# Altium PCB PC110.PcbDoc (part 13 of 24)
Units mm, origin at the board's own origin, x right, y up, seen from the top; angles counter-clockwise.
Board outline 150.05 x 107.35 mm, 10 copper layers (In2.Cu, F.Cu, B.Cu, In1.Cu, In3.Cu, In4.Cu, In5.Cu, In6.Cu, In7.Cu, In8.Cu); 936 components, 1434 nets, 4891 pads, 6088 vias.
Unrouted connection lines stored in the file: 2995.
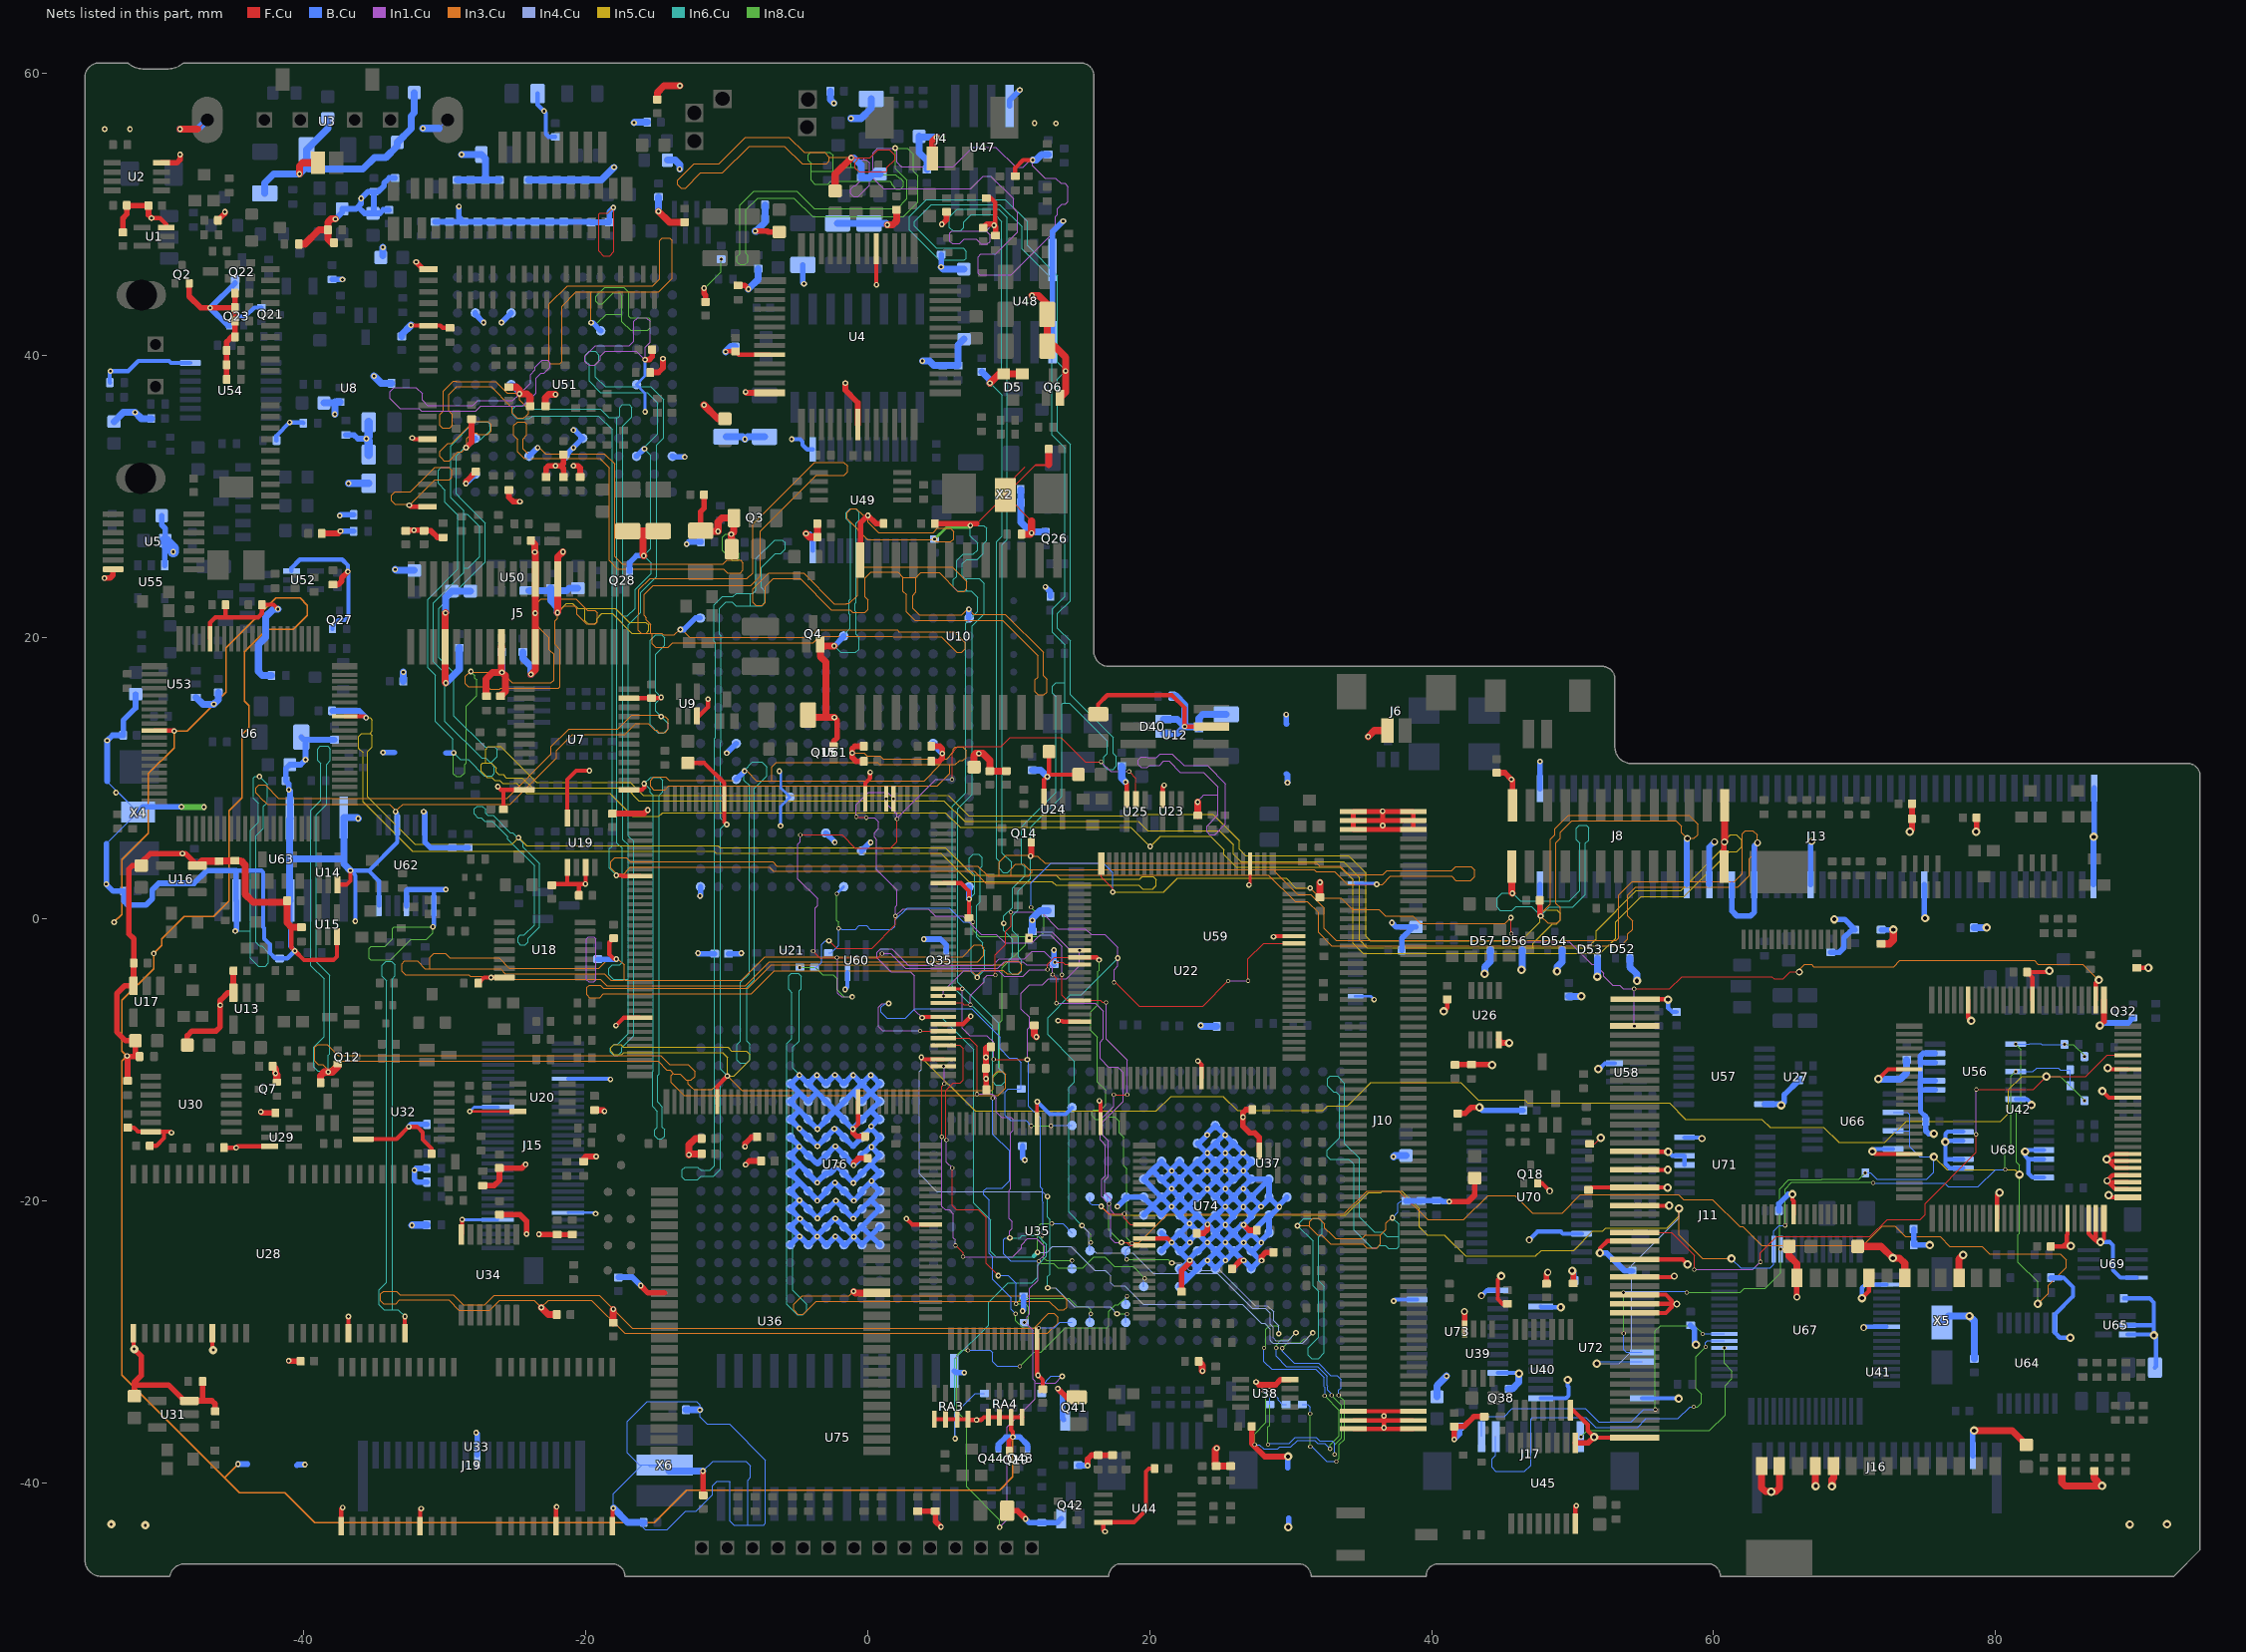
[diagram p20: the nets of this part, all layers, seen from the top]

## Via types
v1: diameter 0.3, hole 0.2, B.Cu to In8.Cu, tented both sides, 1934 vias
v2: diameter 0.4, hole 0.2, F.Cu to B.Cu, tented both sides, 1902 vias
v3: diameter 0.3, hole 0.2, F.Cu to In1.Cu, tented both sides, 1729 vias
v4: diameter 0.6, hole 0.3, F.Cu to B.Cu, tented both sides, 354 vias
v5: diameter 0.5, hole 0.3, F.Cu to B.Cu, tented both sides, 136 vias
v6: diameter 0.4, hole 0.2, B.Cu to In8.Cu, tented both sides, 12 vias
v7: diameter 0.3, hole 0.2, F.Cu to B.Cu, tented both sides, 6 vias
v8: diameter 0.6, hole 0.2, F.Cu to B.Cu, tented both sides, 4 vias
v9: diameter 0.5, hole 0.2, B.Cu to In8.Cu, tented both sides, 3 vias
v10: diameter 0.5, hole 0.2, F.Cu to B.Cu, tented both sides, 2 vias
v11: diameter 0.4, hole 0.3, F.Cu to B.Cu, tented both sides, 2 vias
v12: diameter 0.3, hole 0.2, F.Cu to In4.Cu, tented both sides, 2 vias
v13: diameter 0.6, hole 0.3, B.Cu to In8.Cu, tented both sides, 1 vias
v14: diameter 0.3, hole 0.2, F.Cu to In3.Cu, tented both sides, 1 vias

## Nets (pads, with @x,y where several pads share a name; then routed paths per layer and width w, separated by ;. In a path a pad name is that pad's centre, name@x,y a point inside that pad or via, vN(x,y) a via of type N, cw(c..) or ccw(c..) an arc to the next point about the centre after c; other vN are vias at no path point) (continued)
GND: (continued)
  In8.Cu w0.08: -47.1,7.97 v2(-47.08,7.95) ; v2(-29.37,11.8) -29.38,11.79 -29.38,10.31 -29.2,10.13 -28.85,10.13 -28.59,10.39 -28.59,10.98 -28.48,11.09 -28.48,15.11 -27.72,15.87 -27.72,16.97 -27.86,17.11 -27.86,17.28 v2(-28.15,17.57) ; v2(-19.62,42.31) -19.17,42.31 -19.16,42.3 -18.54,42.92 -17.43,42.92 -17.43,42.84 ; v2(-11.61,44.76) -11.55,44.76 -10.4,45.91 v1(-10.4,46.82) ; -4.01,53.05 -2.29,53.05 -2.02,53.32 -1.17,53.32 ; -2.46,53.05 -2.46,54.17 -2.69,54.4 -4.06,54.4 -4.23,54.23 -4.23,53.82 -4.01,53.6 -4.01,52.4 -3.75,52.14 -2.82,52.14 -2.63,52.33 1.56,52.33 1.71,52.18 1.71,52.1 2.015,51.795 2.335,51.795 2.545,52.005 2.545,52.325 2.325,52.545 2.255,52.545 1.98,52.82 -0.45,52.82 -0.95,53.32 -1.17,53.32 ; v2(-1.17,54) -1.17,53.32 ; 79.37,-0.62 v4(79.37,-0.6) ; -17.43,42.84 -17.43,44.22 -17.62,44.41 -18.06,44.41 -18.81,43.66 -19.11,43.66 -19.29,43.84 -19.29,44.16 -18.64,44.81 -17.3,44.81 -16.94,44.45 -16.94,42.76 -16.83,42.65 -15.53,42.65 -15.42,42.54 -15.42,41.96 -15.61,41.77 -16.82,41.77 -17.43,42.38 -17.43,42.84 ; -35.37,-2.76 -35.37,-2.07 -35.22,-1.92 -34.25,-1.92 -33.71,-1.38 -33.71,-0.65 -33.6,-0.54 -31.05,-0.54 v2(-30.85,-0.54) -30.85,-0.99 -31.29,-1.43 -32.41,-1.43 -33.85,-2.87 -35.26,-2.87 -35.37,-2.76 ; -10.31,26.15 -10.31,27.09 -10.1,27.3 v2(-9.68,27.3) -9.68,26.48 -9.12,25.92 -9.12,25.56 -9.24,25.44 -9.6,25.44 -10.31,26.15 ; -9.265,46.625 -9.265,46.995 -9.07,47.19 -9.07,50.65 -8.12,51.6 -8.07,51.65 -5.05,51.65 -3.83,50.43 -3.79,50.39 2.09,50.39 2.79,51.09 2.79,52.4 1.95,53.24 v2(1.95,54.69) 2.81,54.69 3.24,54.26 3.24,53.06 3.55,52.75 3.55,50.87 2.52,49.84 -3.92,49.84 -5.23,51.15 -7.81,51.15 -8.64,50.32 -8.64,47.2 -8.515,47.075 -8.515,46.625 -8.715,46.425 -9.065,46.425 -9.265,46.625
  In8.Cu w0.2: v6(4.74,26.96) 5.58,27.8 7.16,27.8 v2(7.28,27.92)
  In8.Cu w0.4: v2(-48.68,7.97) -48.66,7.95 -47.12,7.95 -47.1,7.97
  B.Cu w0.08: -54.01,5.35 X4.3@-51.76,7.6 ; -53.95,9.79 X4.3@-51.76,7.6 ; C226.1@-53.46,35.295 C226.1@-53.455,35.295 ; v2(-53.32,8.98) -53.14,8.98 X4.3@-51.76,7.6 ; v2(-36.83,30.91) v2@-36.82,30.92 ; C176.2@-34.535,46.93 C176.2@-34.39,47.075 ; C168.1@-33.365,55.1 C168.1@-33.36,55.1 ; -30.41,56.09 -29.8,56.7 ; -30.001,11.891 -29.91,11.8 ; v2(-28.81,54.24) v2@-28.8,54.23 ; v2(-25.98,42.32) v2@-25.97,42.32 ; v2@-25.96,17.52 v2(-25.95,17.51) ; v2@-23.42,33.44 v2(-23.41,33.44) ; v2@-18.29,-11.32 v2(-18.25,-11.36) ; v2(-18.04,-41.77) -18.04,-40.74 -16.01,-38.71 -15.57,-38.71 -15.49,-38.79 X6.3@-14.46,-38.79 ; C283.2@-15.93,-42.84 -15.93,-43.15 -15.78,-43.3 -14.22,-43.3 -12.92,-42 -12.19,-42 -11,-40.81 -11,-40.2 -10.68,-39.88 -9.81,-39.88 -9.77,-39.92 -9.77,-42.68 -9.49,-42.96 -8.41,-42.96 ; v2@-15.88,33.36 v2(-15.84,33.36) ; v2(-14.85,50.21) v2@-14.84,50.22 ; X6.3@-14.11,-39.14 X6.3@-14.46,-38.79 ; v2@-13.04,32.84 v2(-12.98,32.78) ; v2@-11.91,-34.8 v2(-11.9,-34.81) ; v2(-11.69,-39.14) -10.99,-38.44 -8.65,-38.44 -8.33,-38.76 -8.33,-39.6 -8.51,-39.78 -8.51,-42.96 -8.41,-42.96 ; v2(-8.71,34.05) v2@-8.69,34.05 ; v2(-2.34,5.45) v2@-2.34,5.47 ; v2(5.2,46.26) v2@5.21,46.27 ; v2@7.165,21.975 v2(7.17,21.98) ; v2@7.18,1.44 v2(7.19,1.43) ; C208.1@10.84,30.5 C208.1@10.85,30.49 ; v2(10.98,-27.79) v2@11.05,-27.72 ; v2(13.21,-2.19) v2@13.22,-2.2 ; Q41.1@13.89,-35.47 Q41.1@14.01,-35.59 ; R408.1@14.91,-38.72 R408.1@14.94,-38.75 ; 29.7,10.302 29.7,10.362 ; 29.7,13.859 29.7,13.88 29.76,13.94 ; v4(29.81,-38.11) v4@29.85,-38.15 ; v4(29.82,-43.11) v4@29.85,-43.08 ; v2(37.22,-21.18) 37.62,-20.78 37.62,-20.16 37.8,-19.98 C278.1@38.17,-19.98 ; v4@46.145,-32.175 v4(46.19,-32.22) ; v2(47.68,11.19) v2@47.69,11.18 ; v4@50.6,-5.48 v4(50.61,-5.47) ; v4(51.75,-4.07) v4@51.76,-4.06 ; v4(51.81,-10.63) v4@51.89,-10.63 ; v5@58.09,5.68 v5(58.14,5.73) ; v5@66.89,5.46 v5(66.95,5.52) ; C235.2@70.03,-0.75 C235.2@70.03,-0.74 ; v4@72.74,-0.75 v4(72.75,-0.74) ; v4@75.32,-23.11 v4(75.33,-23.12) ; v4@79.36,-0.61 v4(79.37,-0.6) ; v4(86.97,5.84) v4@86.99,5.86 ; v4(87.44,-22.91) v4@87.45,-22.9 ; X6.3@-14.46,-38.79 -14.54,-38.71 -16.22,-38.71 -17.07,-37.86 -17.07,-35.63 -15.64,-34.2 -12.14,-34.2 -11.9,-34.44 v2(-11.9,-34.81) ; v2(-11.9,-34.81) -11.9,-35.32 -11.41,-35.81 -9.82,-35.81 -7.25,-38.38 -7.25,-42.85 -7.36,-42.96 -8.41,-42.96
  B.Cu w0.2: v2@-28.74,-21.33 v2(-28.77,-21.3) -28.75,-21.32 J15.26@-26.25,-21.32 ; v2(-28.231,-13.628) -27.924,-13.32 J15.10@-26.2,-13.32 ; J15.36@-21.25,-20.82 -21.24,-20.81 -19.38,-20.81 v2(-19.3,-20.89) v2@-19.36,-20.83 ; v2(-15.79,35.99) -15.79,37.31 U51.L7@-16.4,37.92 -15.79,38.53 v2(-15.79,39.69) ; v2(-6.27,10.5) -6.16,10.39 -6.16,9.29 -5.52,8.65 -6.18,7.99 v2(-6.18,6.62) ; U59.39@34.59,-5.46 35.68,-5.46 v2(35.92,-5.7) ; U59.23@34.59,2.54 36.03,2.54 v2(36.1,2.47)
  B.Cu w0.3: R280.2@-53.76,38.06 -53.77,38.07 -53.77,38.82 v2(-53.72,38.87) -52.47,38.87 -51.74,39.6 -49.57,39.6 -49.43,39.46 U54.7@-48.055,39.46 ; Q23.2@-45.26,42.11 -45.26,42.43 -44.95,42.74 -44.15,42.74 -43.5,43.39 Q21.2@-43.01,43.39 ; -44.8,3.45 -43,3.45 -42.88,3.33 -42.88,-0.56 -42.81,-0.63 -42.81,-1.39 -42.4,-1.8 -42.4,-2.4 -42.02,-2.78 C258.1@-41.72,-2.78 -41.17,-2.78 v2(-40.64,-2.25) -40.96,-1.93 U63.12@-40.96,1.31 ; C231.1@-41.94,33.95 -41.94,34.3 v2(-41,35.24) -40.09,35.24 R279.2@-40.04,35.19 ; U63.5@-40.975,7.16 U63.5@-40.96,7.145 ; U52.3@-40.88,24.7 -40.88,24.91 -40.28,25.51 -37.28,25.51 -36.88,25.11 v2(-36.88,24.65) -36.84,24.61 -36.84,21.46 -37.09,21.21 -37.56,21.21 -37.96,20.81 Q27.2@-37.96,20.58 ; v2(-36.35,-0.14) -36.35,3.1 v2(-36.7,3.45) -35.42,3.45 -35.4,3.43 ; U62.7@-34.67,0.957 -34.67,2.7 -35.4,3.43 ; v2(-33.5,7.63) -33.37,7.5 U62.10@-33.37,6.683 -33.37,5.46 -35.4,3.43 ; v2(-30.85,-0.54) -30.77,-0.46 U62.1@-30.77,0.957 -30.77,2.1 ; R230.1@-23.417,58.56 -23.417,57.777 v2(-22.96,57.32) -22.83,57.19 -22.83,55.7 -22.62,55.49 C198.2@-22.16,55.49 ; J15.55@-21.25,-11.32 v2@-18.29,-11.32 ; v2(-5.4,34.05) -4.8,34.05 -4.62,33.87 -4.62,33.64 -4.3,33.32 U49.13@-3.895,33.32 ; v2(-4.38,27.35) -4.09,27.35 -3.895,27.155 U49.12@-3.895,26.12 ; v2(-1.61,-4.99) -1.44,-4.82 U60.3@-1.44,-3.77 ; v2(12.02,-12.94) 12.9,-13.82 14.035,-13.82 U74.P1@14.495,-13.36 ; v2(37.3,-27.08) 37.405,-26.975 U73.19@38.967,-26.975 ; v5(43.54,-26.71) 43.925,-26.325 U73.1@44.693,-26.325 ; U73.10@44.693,-32.175 v4@46.145,-32.175 ; v5(46.92,-22.75) 47.51,-22.16 49.16,-22.16 49.31,-22.31 U70.12@50.645,-22.31 ; U72.13@47.73,-33.975 47.735,-33.98 49.52,-33.98 49.71,-33.79 49.71,-33.56 49.72,-33.55 49.71,-33.54 49.71,-33.17 49.65,-33.11 v4(49.65,-32.67) v4@49.65,-32.83 ; U72.23@47.73,-27.475 47.775,-27.52 v4(49.15,-27.52) ; v4(49.97,-24.93) 50.13,-25.09 50.13,-25.625 C275.2@50.135,-25.63 ; v4@51.89,-10.63 52.3,-10.22 U58.3@52.98,-10.22 ; U72.12@54.93,-33.975 57.485,-33.975 v4(57.52,-34.01) ; v4(56.77,-5.7) 56.77,-6.29 57.06,-6.58 C243.2@57.37,-6.58 ; v4(56.78,-16.49) 57.07,-16.78 U71.5@57.937,-16.78 U71.4@57.937,-17.43 ; U71.7@57.937,-15.48 59.09,-15.48 v5(59.17,-15.56) ; v4(70.52,-26.88) 70.52,-26.15 70.76,-25.91 U67.18@72.26,-25.91 ; v5(70.65,-28.97) 70.71,-28.91 U67.24@72.26,-28.91 ; v4(71.26,-16.47) 71.43,-16.3 U66.7@72.733,-16.3 ; U68.9@77.705,-17.67 76.75,-17.67 76.74,-17.66 76.74,-17.64 76.44,-17.34 76.44,-16.99 ; U68.10@77.705,-17.02 76.47,-17.02 76.44,-16.99 ; U68.12@77.705,-15.72 76.7,-15.72 76.62,-15.8 v4(76.44,-15.8) ; U68.13@77.705,-15.07 76.6,-15.07 76.44,-15.23 v4(76.44,-15.8) ; U56.7@81.423,-12.76 82.23,-12.76 82.55,-13.08 v4(82.55,-13.18) ; U68.7@83.43,-18.32 82.61,-18.32 82.33,-18.04 82.33,-17.03 ; U68.5@83.43,-17.02 82.34,-17.02 82.33,-17.03 ; U68.4@83.43,-16.37 82.21,-16.37 v4(82.1,-16.48) 82.1,-16.8 82.33,-17.03 ; 84.62,-25.43 84.82,-25.43 85.49,-26.1 85.49,-26.74 84.21,-28.02 U64.7@84.21,-28.627 84.21,-29.33 84.56,-29.68 v4(85.3,-29.68) ; v4@87.45,-22.9 88.1,-22.9 88.32,-23.12 88.32,-24.88 88.865,-25.425 U69.4@90.01,-25.425 ; C263.1@89.105,-26.89 90.93,-26.89 91.23,-27.19 91.23,-28.74 ; U65.3@89.36,-29.45 91.16,-29.45 v4(91.23,-29.52) ; U65.2@89.36,-28.8 91.17,-28.8 91.23,-28.74 ; v4@91.14,-29.43 v4(91.23,-29.52) ; C262.1@91.298,-31.8 91.39,-31.708 91.39,-29.68 v4(91.23,-29.52) ; 76.44,-16.99 v4(76.44,-15.8) ; v4(91.23,-29.52) 91.23,-28.74
  B.Cu w0.35: 74.67,-12.11 74.67,-13.63 75.045,-14.005 ; 74.67,-11.44 74.67,-10.16
  B.Cu w0.4: -54.01,5.35 v2(-54.01,2.49) -54.01,2.48 -53.52,1.99 C261.2@-52.76,1.99 -52.76,1.27 -52.49,1 -51.21,1 -50.75,1.46 -50.75,2.08 -50.29,2.54 -47.79,2.54 -46.88,3.45 -44.8,3.45 -44.8,1.325 U63.15@-44.785,1.31 -44.785,-0.765 v2(-44.86,-0.84) ; -53.95,9.79 v2(-53.95,12.67) -53.57,13.05 C230.1@-52.81,13.05 -52.81,14.1 -51.93,14.98 C233.2@-51.93,15.955 ; X4.3@-51.76,7.6 -51.39,7.97 v2(-48.68,7.97) ; D47.2@-50.083,28.62 -50.083,27.962 -49.825,27.705 C224.1@-49.825,26.86 -49.825,26.445 -49.88,26.39 -49.87,26.38 U55.3@-49.87,25.09 ; Q23.2@-45.26,42.11 -45.4,42.11 v2(-46.65,43.36) -46.63,43.36 Q22.1@-44.87,45.12 ; v2(-44.67,-38.64) -44,-38.64 ; U63.5@-40.975,7.16 -40.975,9.095 v2(-41.06,9.18) -41.06,9.59 C260.1@-41.28,9.81 -41.28,10.675 C259.1@-40.995,10.96 -40.23,10.96 v2(-39.88,11.31) -39.88,12.615 C232.1@-40.175,12.91 -40.005,12.74 -39.56,12.74 -39.55,12.73 C223.1@-37.83,12.73 ; -40.491,-38.739 -40.432,-38.68 v2(-39.92,-38.68) ; C227.1@-37.99,14.78 -36.07,14.78 v2(-35.58,14.29) ; R233.2@-37.99,45.37 v2(-37.26,45.37) ; v2(-37.76,49.66) -37.283,50.137 D36.2@-37.283,50.38 -36.31,50.38 -36.155,50.535 ; v2(-37.46,28.62) -37.39,28.69 R270.2@-36.46,28.69 ; v2(-37.4,27.52) R263.2@-36.46,27.52 ; R269.2@-37.02,34.35 -36.44,34.35 -36.17,34.08 v2(-35.56,34.08) ; v2(-34.38,11.82) -33.59,11.82 ; C179.2@-33.96,50.3 -33.97,50.31 -34.37,50.31 -34.615,50.065 C190.2@-35.1,50.065 ; C188.2@-33.53,52.57 -33.95,52.57 -34.31,52.21 -34.31,52.02 -34.73,51.6 C189.1@-35.03,51.6 ; U62.4@-32.72,0.957 -32.72,2 -32.62,2.1 -30.77,2.1 v2(-29.93,2.1) ; v2(-32.55,-14.72) -32.38,-14.55 R404.2@-31.26,-14.55 ; v2(-31.5,7.63) -31.42,7.55 U62.13@-31.42,6.683 -31.42,5.47 -31.03,5.08 C254.1@-29.47,5.08 C256.1@-28.33,5.08 ; R402.2@-31.26,-18.65 -31.96,-18.65 -32.16,-18.45 v2(-32.16,-17.8) -32.04,-17.68 R406.2@-31.26,-17.68 ; C193.2@-30.69,49.46 C173.2@-29.68,49.46 C183.2@-28.66,49.46 ; -29.91,11.8 v2(-29.37,11.8) ; v2(-29,50.55) -29,49.8 C183.2@-28.66,49.46 ; v2(-28.5,30.9) U51.B12@-27.83,31.57 ; v2(-28.49,33.45) U51.B10@-27.83,34.11 ; U51.B3@-27.83,43 -27.83,42.9 v2(-27.25,42.32) ; v2(-27.78,-36.42) -27.7,-36.5 J19.9@-27.7,-38 ; v2@-25.97,42.32 U51.D3@-25.29,43 ; U51.D7@-25.29,37.92 -24.7,37.33 v2(-24.7,37.26) ; U51.E11@-24.02,32.84 v2@-23.42,33.44 ; U51.G11@-21.48,32.84 v2(-20.88,33.44) U51.H10@-20.21,34.11 -20.79,34.69 v2(-20.88,34.69) ; v2(-19.62,42.31) -19.52,42.31 U51.J4@-18.94,41.73 ; C255.1@-19.15,-2.84 -17.84,-2.84 v2(-17.83,-2.83) ; v2(-18.04,50.47) -18.34,50.17 C195.1@-18.34,49.43 -19.62,49.43 C177.1@-19.64,49.41 -19.695,49.465 -21.545,49.465 C178.2@-21.55,49.46 C196.2@-22.55,49.46 C187.2@-23.59,49.46 C180.2@-24.59,49.46 C169.2@-25.52,49.46 C184.2@-26.74,49.46 C181.2@-27.67,49.46 C183.2@-28.66,49.46 ; C282.2@-17.69,-25.41 -17.67,-25.39 -16.7,-25.39 v2(-16.1,-25.99) ; Q28.2@-16.9,24.67 -16.9,25.29 -16.41,25.78 v2(-15.89,25.78) ; U51.L11@-16.4,32.84 v2@-15.88,33.36 ; U51.N11@-13.86,32.84 -13.8,32.78 v2(-12.98,32.78) ; v2(-13.29,20.54) -13.04,20.54 -12.2,21.38 U61.A1@-11.885,21.38 ; v2(-12.85,26.6) -12.69,26.76 C212.2@-11.83,26.76 ; v2(-12.04,-2.4) -11.99,-2.45 C253.2@-10.86,-2.45 ; v2(-11.89,1.65) -11.87,1.67 U61.A16@-11.87,2.3 ; v2(-10,11.78) -10,11.79 U61.C8@-9.33,12.46 ; C252.2@-9.88,-2.45 -9.02,-2.45 v2(-8.97,-2.4) ; U61.C10@-9.33,9.92 v2(-8.74,10.51) ; U76.F13@-5.49,-23.09 -4.91,-22.51 v2(-4.83,-22.51) ; U76.F7@-5.49,-15.47 -4.85,-16.11 v2(-4.85,-16.13) ; C160.1@-4.6,46.405 -4.6,45.15 v2(-4.52,45.07) ; U61.H13@-2.98,6.11 v2@-2.34,5.47 ; v2(-2.38,19.38) -2.37,19.38 -1.725,20.025 U61.J2@-1.725,20.11 ; U61.K14@-0.44,4.84 0.16,5.44 v2(0.21,5.44) ; U76.L13@0.86,-23.09 U76.K12@-0.41,-21.82 ; U76.L12@0.86,-21.82 U76.K13@-0.41,-23.09 -0.98,-22.52 v2(-0.99,-22.52) ; v2(3.98,-1.41) 5.16,-1.41 5.58,-1.83 Q35.2@5.58,-2.275 ; U61.P8@4.64,12.46 4.64,12.41 v2(5.29,11.76) ; v2@5.21,46.27 C155.1@5.21,47.14 ; U75.14@6.14,-32.04 6.26,-32.16 v2(6.84,-32.16) ; U61.T1@7.165,21.38 v2@7.165,21.975 ; v2@7.18,1.44 U61.T16@7.18,2.3 ; Q44.2@9.27,-37.585 9.27,-37.25 9.79,-36.73 9.94,-36.73 ; U47.4@10.06,57.68 10.06,58.08 v2(10.79,58.81) ; v2(10.29,-36.73) 9.94,-36.73 ; R395.1@10.98,-16.09 10.98,-16.92 v2(11.14,-17.08) ; v2@11.05,-27.72 C280.1@11.05,-26.75 ; v2(11.19,-42.54) 11.46,-42.81 R411.1@12.35,-42.81 13.43,-42.81 Q42.1@13.73,-42.51 ; Q43.2@11.34,-37.585 11.34,-37.28 10.79,-36.73 9.94,-36.73 ; v2(12.6,23.57) 12.96,23.21 C205.2@12.96,22.9 ; U48.5@13.115,40.91 13.115,46.525 13.11,46.53 U48.4@13.11,46.76 13.11,48.77 v2(13.86,49.52) ; R314.2@13.22,-3.19 v2@13.22,-2.2 ; v2(13.48,-33.29) 13.81,-33.62 13.81,-35.39 Q41.1@13.89,-35.47 ; R408.1@14.94,-38.75 v2(15.6,-38.75) ; v2(17.71,-20.38) 18.3,-19.79 18.3,-19.72 19.57,-19.72 20.84,-20.99 21.44,-20.39 v2(21.55,-20.39) ; U74.H5@19.57,-20.99 U74.J6@20.84,-19.72 ; U74.F6@20.84,-23.53 21.44,-22.93 v2(21.56,-22.93) ; U74.G6@20.84,-22.26 21.51,-22.93 v2(21.56,-22.93) ; U74.D7@22.11,-26.07 22.775,-25.405 ; U74.K9@24.65,-18.42 v2(24.08,-17.85) ; 26.46,-20.26 v2@26.65,-20.26 ; v2(29.69,14.52) 29.69,13.869 29.7,13.859 ; 29.7,10.302 29.77,10.232 v2(29.77,9.69) ; U74.J13@29.73,-19.72 29.2,-20.25 v2(29.2,-20.4) ; 29.8,-38.9 29.8,-38.2 v4@29.85,-38.15 ; v4@29.85,-43.08 29.85,-42.47 ; v2(37.18,-0.25) 37.485,-0.555 C245.1@38.89,-0.555 38.685,-0.555 37.88,-1.36 C249.1@37.88,-2.2 ; C278.1@38.17,-19.98 C279.2@39.25,-19.98 39.28,-19.95 R379.1@40.34,-19.95 40.69,-19.95 40.77,-20.03 v2(41.25,-20.03) ; v2(41.6,-36.89) 41.99,-36.5 R383.1@41.99,-35.99 ; v4(43.39,-13.35) 43.6,-13.56 C276.2@46.49,-13.56 ; J13.51@47.69,2.45 47.69,0.27 v2(47.73,0.23) ; J13.50@47.69,9.25 v2@47.69,11.18 ; v4(51.94,-23.68) 52.42,-23.68 53.69,-24.95 C272.2@54.235,-24.95 ; J13.64@58.09,2.45 v5@58.09,5.68 ; C274.2@58.37,-28.805 58.65,-29.085 58.65,-30.09 v4(58.74,-30.18) ; J13.66@59.69,2.45 59.69,5.12 v5(60.06,5.49) ; J13.68@61.29,2.45 61.29,0.59 61.65,0.23 62.62,0.23 62.89,0.5 J13.70@62.89,2.45 62.89,5.2 v5(63.11,5.42) ; U57.7@63.603,-13.12 64.73,-13.12 v4(64.8,-13.19) 65.01,-12.98 65.01,-12.45 65.02,-12.45 C242.1@66.07,-11.4 ; C265.1@64.63,-20.68 64.63,-20.18 65.3,-19.51 v4(65.59,-19.51) ; J13.75@66.89,2.45 v5@66.89,5.46 ; C241.1@68.31,-2.35 68.92,-2.35 69.25,-2.02 69.25,-1.32 69.82,-0.75 C235.2@70.03,-0.75 ; v4(68.56,-0.01) 69.3,-0.01 C235.2@70.03,-0.74 ; C237.2@71.89,-0.75 v4@72.74,-0.75 ; C267.1@74.195,-21.98 74.205,-21.99 74.205,-23.11 v4@75.32,-23.11 ; J13.85@74.94,2.45 74.94,0.13 v4(75,0.07) ; 75.045,-14.005 75.045,-14.33 75.045,-15.005 75.25,-15.21 v4(75.63,-15.21) ; U56.9@75.697,-12.11 74.67,-12.11 74.67,-11.44 74.69,-11.46 U56.10@75.697,-11.46 ; U56.12@75.697,-10.16 74.67,-10.16 74.67,-9.71 74.87,-9.51 U56.13@75.697,-9.51 ; J16.2@78.39,-38.04 78.38,-38.03 78.38,-36.36 v4(78.47,-36.27) ; C269.1@83.925,-25.43 84.62,-25.43 ; J13.100@86.94,2.45 86.94,5.81 86.99,5.86 86.99,6.33 J13.1@86.99,9.3 ; v4(87.4,-7.54) 87.59,-7.35 89.407,-7.35 Q32.2@89.748,-7.01 ; -36.155,50.535 -35.685,50.065 C190.2@-35.1,50.065 ; -36.155,50.535 -35.94,50.75 v2(-35.94,51.12) -35.46,51.6 C189.1@-35.03,51.6 ; C190.2@-35.1,50.065 -35.03,50.135 C189.1@-35.03,51.6 ; -4.865,-17.365 -4.865,-17.385 U76.F9@-5.49,-18.01 -4.815,-18.685 ; -4.865,-17.365 U76.F8@-5.49,-16.74 -4.88,-16.13 v2(-4.85,-16.13) ; -4.865,-17.365 U76.G9@-4.22,-18.01 -4.22,-18.05 v2(-3.58,-18.69) -3.58,-18.64 U76.H9@-2.95,-18.01 -2.67,-18.01 v2(-2.08,-17.42) -2.08,-17.61 U76.J9@-1.68,-18.01 -1.68,-18.04 v2(-1.02,-18.7) -1.02,-18.62 U76.K9@-0.41,-18.01 0.235,-17.365 ; v2(-4.85,-16.13) -4.24,-16.74 U76.G8@-4.22,-16.74 -3.73,-17.23 -3.66,-17.23 -3.55,-17.34 U76.H8@-2.95,-16.74 -2.32,-16.11 v2(-2.29,-16.11) -1.68,-16.72 U76.J8@-1.68,-16.74 -1.01,-17.41 v2(-1.01,-17.46) -0.41,-16.86 U76.K8@-0.41,-16.74 0.17,-16.16 v2(0.27,-16.16) ; v2(-4.84,-19.94) -4.83,-19.94 U76.G11@-4.22,-20.55 -4.22,-20.56 v2(-3.57,-21.21) -3.57,-21.17 U76.H11@-2.95,-20.55 -2.84,-20.55 v2(-2.26,-19.97) U76.J11@-1.68,-20.55 -1.68,-20.57 v2(-1.02,-21.23) -1.02,-21.16 U76.K11@-0.41,-20.55 0.205,-19.935 ; v2(-4.84,-19.94) -5.49,-19.29 U76.F10@-5.49,-19.28 -4.895,-18.685 -4.815,-18.685 ; v2(-4.84,-19.94) -4.88,-19.94 U76.F11@-5.49,-20.55 -5.49,-20.56 v2(-4.81,-21.24) ; v2(-4.83,-22.51) -4.8,-22.51 U76.G13@-4.22,-23.09 -4.18,-23.09 v2(-3.59,-22.5) ; v2(-4.83,-22.51) -5.49,-21.85 U76.F12@-5.49,-21.82 -4.91,-21.24 v2(-4.81,-21.24) ; -4.82,-12.33 -4.89,-12.33 U76.F5@-5.49,-12.93 -4.81,-13.61 ; -4.82,-12.33 U76.F4@-5.49,-11.66 -5.45,-11.66 v2(-4.85,-11.06) -4.25,-11.66 U76.G4@-4.22,-11.66 ; -4.82,-12.33 U76.G5@-4.22,-12.93 -3.595,-12.305 -3.575,-12.305 ; -4.815,-18.685 U76.G10@-4.22,-19.28 -3.58,-19.92 v2(-3.58,-19.97) -2.95,-19.34 U76.H10@-2.95,-19.28 -2.36,-18.69 v2(-2.32,-18.69) -1.73,-19.28 U76.J10@-1.68,-19.28 v2(-0.99,-19.97) -0.41,-19.39 U76.K10@-0.41,-19.28 0.27,-18.6 v2(0.27,-18.57) ; v2(-4.81,-21.24) -4.8,-21.24 U76.G12@-4.22,-21.82 -3.59,-22.45 v2(-3.59,-22.5) ; -4.81,-13.61 -4.9,-13.61 U76.F6@-5.49,-14.2 v2(-4.85,-14.84) U76.G7@-4.22,-15.47 -4.2,-15.47 v2(-3.57,-16.1) -3.57,-16.09 U76.H7@-2.95,-15.47 -2.95,-15.46 v2(-2.36,-14.87) -2.28,-14.87 U76.J7@-1.68,-15.47 -1.06,-16.09 -1.02,-16.09 -1.02,-16.08 U76.K7@-0.41,-15.47 0.24,-14.82 v2(0.24,-14.69) ; -4.81,-13.61 U76.G6@-4.22,-14.2 -4.22,-14.24 v2(-3.57,-14.89) -2.95,-14.27 U76.H6@-2.95,-14.2 U76.J5@-1.68,-12.93 -1.03,-12.28 ; U76.G4@-4.22,-11.66 -3.63,-11.07 v2(-3.6,-11.07) -3.01,-11.66 U76.H4@-2.95,-11.66 -2.34,-11.05 v2(-2.33,-11.05) -1.72,-11.66 U76.J4@-1.68,-11.66 -1.09,-11.07 v2(-1.03,-11.07) -0.44,-11.66 U76.K4@-0.41,-11.66 ; U76.G4@-4.22,-11.66 -3.575,-12.305 ; v2(-3.59,-22.5) -3.59,-22.46 U76.H12@-2.95,-21.82 -2.36,-21.23 v2(-2.29,-21.23) -1.7,-21.82 U76.J12@-1.68,-21.82 -0.99,-22.51 v2(-0.99,-22.52) ; v2(-3.59,-22.5) -3.54,-22.5 U76.H13@-2.95,-23.09 -2.88,-23.09 v2(-2.3,-22.51) -2.26,-22.51 U76.J13@-1.68,-23.09 -1.56,-23.09 v2(-0.99,-22.52) ; -3.575,-12.305 U76.H5@-2.95,-12.93 U76.J6@-1.68,-14.2 -1.68,-14.26 v2(-1.05,-14.89) -1.05,-14.84 U76.K6@-0.41,-14.2 0.235,-13.555 ; -1.03,-12.28 U76.K4@-0.41,-11.66 ; -1.03,-12.28 -1.03,-12.31 U76.K5@-0.41,-12.93 U76.L4@0.86,-11.66 0.27,-11.07 v2(0.22,-11.07) 0.18,-11.07 U76.K4@-0.41,-11.66 ; v2(-0.99,-22.52) -0.99,-22.4 U76.K12@-0.41,-21.82 ; U76.K12@-0.41,-21.82 U76.L11@0.86,-20.55 0.245,-19.935 0.205,-19.935 ; U76.K4@-0.41,-11.66 U76.L5@0.86,-12.93 0.235,-13.555 ; 0.205,-19.935 U76.L10@0.86,-19.28 0.27,-18.69 v2(0.27,-18.57) ; 0.235,-17.365 0.235,-17.385 U76.L9@0.86,-18.01 0.83,-18.01 v2(0.27,-18.57) ; 0.235,-17.365 U76.L8@0.86,-16.74 0.28,-16.16 v2(0.27,-16.16) ; 0.235,-13.555 0.235,-13.575 U76.L6@0.86,-14.2 0.73,-14.2 v2(0.24,-14.69) ; v2(0.24,-14.69) 0.24,-14.85 U76.L7@0.86,-15.47 0.86,-15.57 v2(0.27,-16.16) ; 20.25,-17.77 20.84,-17.18 21.51,-17.85 v2(21.56,-17.85) ; 20.25,-17.77 20.25,-17.86 U74.K6@20.84,-18.45 ; 20.25,-17.77 19.57,-18.45 U74.J6@20.84,-19.72 ; U74.J6@20.84,-19.72 20.94,-19.72 v2(21.55,-19.11) ; U74.J6@20.84,-19.72 21.51,-20.39 v2(21.55,-20.39) ; U74.K6@20.84,-18.45 20.96,-18.45 v2(21.56,-17.85) ; U74.K6@20.84,-18.45 21.5,-19.11 v2(21.55,-19.11) ; v2(21.55,-20.39) 22.11,-20.95 U74.H7@22.11,-20.99 ; v2(21.55,-20.39) 22.11,-19.83 U74.J7@22.11,-19.72 ; v2(21.55,-19.11) 21.55,-19.16 U74.J7@22.11,-19.72 ; v2(21.55,-19.11) 21.55,-19.01 U74.K7@22.11,-18.45 ; v2(21.56,-22.93) 21.56,-22.81 U74.G7@22.11,-22.26 ; v2(21.56,-22.93) 22.11,-23.48 U74.F7@22.11,-23.53 ; v2(21.56,-17.85) 21.56,-17.73 22.11,-17.18 U74.K8@23.38,-18.45 ; v2(21.56,-17.85) 21.56,-17.9 U74.K7@22.11,-18.45 ; U74.F7@22.11,-23.53 22.78,-24.2 v2(22.84,-24.2) ; U74.F7@22.11,-23.53 22.25,-23.53 v2(22.85,-22.93) ; U74.G7@22.11,-22.26 22.16,-22.26 v2(22.83,-21.59) ; U74.G7@22.11,-22.26 22.18,-22.26 v2(22.85,-22.93) ; U74.H7@22.11,-20.99 U74.J8@23.38,-19.72 ; U74.H7@22.11,-20.99 22.71,-21.59 v2(22.83,-21.59) ; U74.J7@22.11,-19.72 U74.K8@23.38,-18.45 ; U74.J7@22.11,-19.72 U74.H8@23.38,-20.99 ; U74.K7@22.11,-18.45 U74.L8@23.38,-17.18 ; U74.K7@22.11,-18.45 U74.J8@23.38,-19.72 ; 22.775,-25.405 U74.E8@23.38,-24.8 ; 22.775,-25.405 22.715,-25.405 22.11,-24.8 22.24,-24.8 v2(22.84,-24.2) ; v2(22.83,-21.59) 23.38,-22.14 U74.G8@23.38,-22.26 ; v2(22.83,-21.59) 22.83,-21.54 U74.H8@23.38,-20.99 ; v2(22.84,-24.2) 23.38,-24.74 U74.E8@23.38,-24.8 ; v2(22.84,-24.2) 22.84,-24.07 23.38,-23.53 23.49,-23.53 v2(24.09,-22.93) ; v2(22.85,-22.93) 22.85,-22.79 U74.G8@23.38,-22.26 ; U74.E8@23.38,-24.8 23.98,-24.2 v2(24.1,-24.2) ; U74.G8@23.38,-22.26 24.05,-22.93 v2(24.09,-22.93) ; U74.G8@23.38,-22.26 23.49,-22.26 v2(24.1,-21.65) ; U74.H8@23.38,-20.99 24.04,-21.65 v2(24.1,-21.65) ; U74.J8@23.38,-19.72 23.5,-19.72 v2(24.09,-19.13) ; U74.K8@23.38,-18.45 24.06,-19.13 v2(24.09,-19.13) ; U74.K8@23.38,-18.45 23.48,-18.45 v2(24.08,-17.85) ; U74.L8@23.38,-17.18 24.05,-17.85 v2(24.08,-17.85) ; U74.L8@23.38,-17.18 23.49,-17.18 v2(24.09,-16.58) ; v2(24.08,-17.85) 24.08,-17.75 U74.L9@24.65,-17.18 ; v2(24.09,-22.93) 24.65,-22.37 U74.G9@24.65,-22.26 ; v2(24.09,-22.93) 24.09,-22.97 U74.F9@24.65,-23.53 ; v2(24.09,-19.13) 24.65,-19.69 U74.J9@24.65,-19.72 ; v2(24.09,-19.13) 24.65,-18.57 U74.K9@24.65,-18.45 ; v2(24.09,-16.58) 24.05,-16.58 23.38,-15.91 23.47,-15.91 v2(24.08,-15.3) 24.08,-15.21 24.65,-14.64 24.68,-14.64 v2(25.35,-15.31) ; v2(24.09,-16.58) 24.09,-16.47 U74.M9@24.65,-15.91 ; v2(24.09,-16.58) 24.09,-16.62 U74.L9@24.65,-17.18 ; v2(24.1,-24.2) 24.65,-23.65 U74.F9@24.65,-23.53 ; v2(24.1,-24.2) 24.65,-24.75 24.65,-24.8 25.25,-24.2 v2(25.37,-24.2) ; v2(24.1,-21.65) 24.1,-21.54 U74.H9@24.65,-20.99 ; v2(24.1,-21.65) 24.65,-22.2 U74.G9@24.65,-22.26 ; U74.F9@24.65,-23.53 24.7,-23.53 v2(25.37,-24.2) ; U74.F9@24.65,-23.53 24.75,-23.53 v2(25.36,-22.92) ; U74.G9@24.65,-22.26 25.24,-21.67 v2(25.37,-21.67) ; U74.G9@24.65,-22.26 25.31,-22.92 v2(25.36,-22.92) ; U74.H9@24.65,-20.99 24.76,-20.99 v2(25.36,-20.39) ; U74.H9@24.65,-20.99 25.33,-21.67 v2(25.37,-21.67) ; U74.J9@24.65,-19.72 25.25,-19.12 v2(25.37,-19.12) ; U74.J9@24.65,-19.72 24.69,-19.72 v2(25.36,-20.39) ; U74.K9@24.65,-18.45 24.7,-18.45 v2(25.37,-19.12) ; U74.K9@24.65,-18.45 25.25,-17.85 v2(25.36,-17.85) ; U74.L9@24.65,-17.18 24.76,-17.18 v2(25.36,-16.58) ; U74.L9@24.65,-17.18 25.32,-17.85 v2(25.36,-17.85) ; U74.M9@24.65,-15.91 25.32,-16.58 v2(25.36,-16.58) ; U74.M9@24.65,-15.91 25.25,-15.31 v2(25.35,-15.31) ; v2(25.35,-15.31) 25.92,-15.88 U74.M10@25.92,-15.91 ; v2(25.36,-22.92) 25.36,-22.97 U74.F10@25.92,-23.53 ; v2(25.36,-22.92) 25.36,-22.82 U74.G10@25.92,-22.26 ; v2(25.36,-20.39) 25.92,-20.95 U74.H10@25.92,-20.99 ; v2(25.36,-20.39) 25.36,-20.28 U74.J10@25.92,-19.72 ; v2(25.36,-17.85) 25.92,-17.29 U74.L10@25.92,-17.18 ; v2(25.36,-17.85) 25.92,-18.41 U74.K10@25.92,-18.45 ; v2(25.36,-16.58) 25.92,-17.14 U74.L10@25.92,-17.18 ; v2(25.36,-16.58) 25.36,-16.47 U74.M10@25.92,-15.91 ; v2(25.37,-24.2) 25.92,-23.65 U74.F10@25.92,-23.53 ; v2(25.37,-21.67) 25.37,-21.71 U74.G10@25.92,-22.26 ; v2(25.37,-21.67) 25.92,-21.12 U74.H10@25.92,-20.99 ; v2(25.37,-19.12) 25.92,-19.67 U74.J10@25.92,-19.72 ; v2(25.37,-19.12) 25.37,-19 U74.K10@25.92,-18.45 ; U74.F10@25.92,-23.53 26.07,-23.53 v2(26.66,-22.94) ; U74.F10@25.92,-23.53 26.59,-24.2 v2(26.66,-24.2) 27.19,-24.73 27.19,-24.8 27.78,-24.21 v2(27.93,-24.21) 27.87,-24.21 U74.F11@27.19,-23.53 ; U74.G10@25.92,-22.26 26.6,-22.94 v2(26.66,-22.94) ; U74.G10@25.92,-22.26 26.51,-21.67 v2(26.66,-21.67) ; U74.H10@25.92,-20.99 26.51,-20.4 v2(26.65,-20.4) ; U74.J10@25.92,-19.72 26.6,-20.4 v2(26.65,-20.4) ; U74.J10@25.92,-19.72 26.53,-19.11 v2(26.65,-19.11) ; U74.K10@25.92,-18.45 26.04,-18.45 v2(26.64,-17.85) ; U74.L10@25.92,-17.18 26.59,-17.85 v2(26.64,-17.85) ; U74.L10@25.92,-17.18 26.03,-17.18 v2(26.63,-16.58) ; U74.M10@25.92,-15.91 25.96,-15.91 v2(26.63,-16.58) ; v2(26.63,-16.58) 26.63,-16.62 27.19,-17.18 27.19,-17.3 v2(26.64,-17.85) ; v2(26.64,-17.85) 26.64,-17.9 U74.K11@27.19,-18.45 ; v2(26.65,-20.4) v2@26.65,-20.26 ; v2(26.65,-20.4) 27.19,-20.94 U74.H11@27.19,-20.99 ; v2@26.65,-20.26 U74.J11@27.19,-19.72 ; v2(26.65,-19.11) 27.19,-19.65 U74.J11@27.19,-19.72 ; v2(26.65,-19.11) 26.65,-18.99 U74.K11@27.19,-18.45 ; v2(26.66,-22.94) 26.66,-23 U74.F11@27.19,-23.53 ; v2(26.66,-22.94) 26.66,-22.79 U74.G11@27.19,-22.26 ; v2(26.66,-21.67) 26.66,-21.73 U74.G11@27.19,-22.26 ; v2(26.66,-21.67) 27.19,-21.14 U74.H11@27.19,-20.99 ; U74.F11@27.19,-23.53 27.33,-23.53 v2(27.92,-22.94) ; U74.G11@27.19,-22.26 U74.H12@28.46,-20.99 ; U74.G11@27.19,-22.26 27.87,-22.94 v2(27.92,-22.94) ; U74.H11@27.19,-20.99 27.8,-20.38 v2(27.9,-20.38) ; U74.J11@27.19,-19.72 U74.K12@28.46,-18.45 ; U74.J11@27.19,-19.72 27.24,-19.72 v2(27.9,-20.38) ; U74.K11@27.19,-18.45 U74.K12@28.46,-18.45 ; v2(27.9,-20.38) 28.46,-19.82 U74.J12@28.46,-19.72 ; v2(27.92,-22.94) 27.92,-22.8 28.46,-22.26 U74.H12@28.46,-20.99 ; U74.H12@28.46,-20.99 28.61,-20.99 v2(29.2,-20.4) ; U74.J12@28.46,-19.72 U74.K12@28.46,-18.45 ; U74.J12@28.46,-19.72 29.14,-20.4 v2(29.2,-20.4)
  B.Cu w0.5: C226.1@-53.455,35.295 -52.8,35.95 v2(-51.97,35.95) -51.53,35.51 C228.2@-50.82,35.51 ; v2(-48.78,56.04) -47.51,56.04 -46.85,56.7 ; U53.3@-47.65,15.73 -47.17,15.25 v2(-46.38,15.25) -46.07,15.56 C234.1@-46.07,16.08 ; C200.1@-42.77,51.485 -42.77,52.22 -42.13,52.86 v2(-40.31,52.86) -39.81,53.36 ; R275.2@-42.29,17.29 -42.95,17.29 -43.22,17.56 -43.22,19.47 -42.72,19.97 -42.72,21.44 -42.16,22 v2(-41.84,22) ; U63.12@-40.96,1.31 -41,1.35 -41,4.27 ; U63.5@-40.96,7.145 -41,7.105 -41,4.27 ; C229.1@-38.575,36.62 -37.85,36.62 -37.8,36.67 ; C202.1@-38.3,56.785 -38.3,56.075 C201.2@-39.805,54.57 -39.81,54.565 -39.81,53.36 ; v2(-37.8,35.81) -37.8,36.67 ; R265.2@-37.43,36.68 -37.79,36.68 -37.8,36.67 ; v2@-36.82,30.92 R273.2@-35.392,30.92 ; v2(-36.7,3.45) -37.165,3.915 -37.165,4.21 ; v2(-36.15,7.14) -36.22,7.21 U63.8@-37.165,7.21 -37.165,4.21 ; v2(-35.02,38.52) -34.52,38.02 R259.2@-33.78,38.02 ; C176.2@-34.39,47.075 v2(-34.39,47.65) ; v2(-33.52,24.8) -33.455,24.735 C218.2@-32.16,24.735 ; C168.1@-33.365,55.1 -33.365,54.845 -34.2,54.01 -35,54.01 -35.81,53.2 -39.65,53.2 -39.81,53.36 ; C168.1@-33.36,55.1 -32.39,56.07 -32.39,56.97 -32.165,57.195 C197.1@-32.165,58.63 ; C172.1@-33.06,41.33 -33.06,41.47 v2(-32.4,42.13) ; C220.1@-32.94,16.88 v2(-32.94,17.52) ; v2(-32.33,-21.71) -32.31,-21.69 R405.2@-31.26,-21.69 ; v2(-31.55,56.09) -30.41,56.09 ; v2(-29.95,21.73) -29.95,22.825 C221.1@-29.51,23.265 C222.1@-28.18,23.265 ; v2(-29.93,16.76) -28.97,17.72 C217.2@-28.97,19.25 ; C171.2@-29.14,52.43 C194.2@-28.17,52.43 C191.2@-27.13,52.43 ; v2@-28.8,54.23 L10.2@-27.403,54.23 -27.12,53.947 -27.12,52.44 C191.2@-27.13,52.43 ; C185.2@-26.13,52.43 C191.2@-27.13,52.43 ; v2@-25.96,17.52 C219.2@-25.96,18.95 ; C216.2@-24.46,18.95 -24.46,18.51 -23.89,17.94 v2(-23.89,17.37) ; C182.2@-24.08,52.43 C186.2@-23.06,52.43 C175.2@-22.05,52.43 C174.2@-21.04,52.43 C192.2@-20.01,52.43 -18.89,52.43 v2(-17.99,53.33) ; U50.3@-24.052,23.3 -23,23.3 ; v2(-22.01,21.74) -22.01,22.1 -22.49,22.58 R271.1@-22.49,23.5 -22.69,23.3 -23,23.3 ; D41.2@-20.56,23.473 -21.167,23.473 -21.34,23.3 -23,23.3 ; v2(-18.04,-41.77) -17.03,-42.78 C283.2@-15.89,-42.78 -15.89,-42.8 C283.2@-15.93,-42.84 ; v2(-16.58,56.49) -16.54,56.53 C199.2@-15.64,56.53 ; v2@-14.84,50.22 C170.2@-14.84,51.22 ; R231.1@-14.205,53.84 -13.66,53.84 -13.34,53.52 v2(-13.34,53.2) ; X6.3@-14.11,-39.14 v2(-11.69,-39.14) ; C281.1@-12.89,-34.8 v2@-11.91,-34.8 ; v2(-10.08,40.25) -9.72,40.61 C156.1@-9.41,40.61 ; C210.1@-10.05,34.225 -8.885,34.225 v2(-8.71,34.05) ; v2@-8.69,34.05 -8.525,34.215 C206.1@-7.32,34.215 ; v2(-8.47,44.69) -7.76,45.4 C159.1@-7.76,46.14 ; v2(-7.98,48.81) -7.9,48.81 -7.29,49.42 C167.1@-7.29,49.65 C163.1@-7.29,50.66 ; C165.2@-2.64,58.73 -2.64,58.12 v2(-2.4,57.88) ; C152.2@-2.14,49.345 C161.2@0.1,49.345 1.295,49.345 v2(1.39,49.25) ; v2(-1.19,56.8) -0.47,56.8 0.25,57.52 C162.2@0.25,58.185 ; v2(-1.17,54) -0.98,54 -0.46,53.48 R224.2@-0.46,52.59 0.11,52.59 0.375,52.855 C166.2@0.88,52.855 ; v2(3.88,39.59) 4.37,39.59 4.69,39.27 R219.1@5.33,39.27 R223.2@6.41,39.27 6.41,40.725 C158.1@6.83,41.145 ; C151.2@4.2,53.17 4.2,53.82 3.645,54.375 C164.1@3.645,55.53 3.715,55.46 v2(4.88,55.46) ; v2(5.2,46.26) 5.355,46.105 C153.2@6.82,46.105 ; C149.1@8.09,38.83 8.67,38.25 v2(8.67,38.02) ; C208.1@10.85,30.49 C211.1@10.85,29.54 10.85,28.16 v2(11.62,27.39) 11.71,27.48 12.6,27.48 Q26.2@12.61,27.49 ; C251.1@11.66,10.57 12.27,10.57 v2(12.73,10.11) ; R327.2@11.67,-0.87 v2(11.67,-0.08) 11.67,0.05 12.205,0.585 C246.2@12.8,0.585 ; v2(11.7,53.85) 11.94,53.85 12.33,54.24 R218.1@12.8,54.24 ; C250.1@18.02,10.86 18.02,10 v2(18.29,9.73) ; D40.1@20.97,13.18 22,13.18 v2(22.48,13.66) ; D40.2@20.97,14.18 21.96,14.18 v2(22.48,13.66) ; R247.2@21.61,15.82 21.87,15.82 22.48,15.21 v2(22.48,13.66) ; v2(23.62,-7.53) 23.7,-7.61 C247.2@24.76,-7.61 ; C204.1@25.43,14.525 23.765,14.525 23.5,14.26 C203.1@23.5,13.53 23.37,13.66 v2(22.48,13.66) ; v2(37.29,-16.85) 37.375,-16.765 C273.2@38.17,-16.765 ; C277.1@40.38,-33.875 40.38,-33.08 v2(41.06,-32.4) ; v4(43.76,-3.87) 43.76,-3.4 44.15,-3.01 D57.1@44.15,-2.2 ; Q38.2@45.44,-33.32 45.71,-33.32 46.19,-32.84 v4(46.19,-32.22) ; v4(46.37,-3.59) 46.43,-3.53 D56.1@46.43,-2.2 ; v4(48.9,-3.7) 48.9,-3.38 49.24,-3.04 D54.1@49.24,-2.2 ; C244.1@49.73,-5.48 v4@50.6,-5.48 ; v4@51.76,-4.06 D53.1@51.76,-2.78 ; D52.1@54.05,-2.77 54.05,-3.39 54.56,-3.9 v4(54.56,-4.36) ; v4(71.69,-11.34) 73.24,-11.34 73.7,-10.88 C236.2@73.7,-9.965 ; X5.3@76.21,-28.6 76.66,-28.15 v4(78.15,-28.15) 78.48,-28.48 78.48,-30.09 78.49,-30.1 C268.1@78.49,-31.175 ; C239.1@78.47,-0.61 v4@79.36,-0.61 ; -41,4.27 -37.225,4.27 -37.165,4.21
  B.Cu w0.6: R264.2@-35.392,32.95 -35.392,33.913 v2(-35.56,34.08) -35.392,34.248 R267.2@-35.392,35.25
  B.Cu w0.8: C224.1@-49.825,26.86 -49.27,26.305 v2(-49.27,26.06)
  other v2: -54.13,56.04 -52.33,56.04 11.83,56.46 13.35,56.45
  other v4: 89.52,-42.93 92.16,-42.92
  other v8: -51.24,-42.99 -53.66,-42.92
IOCS16#: J11.47 R319.2 U22.25 U42.52 U61.J16 U74.B1 | length 153
  F.Cu w0.08: U22.25@16.58,3.94 16.58,2.97 17.38,2.17 v2(17.38,1.92) ; v2(45.62,0.11) 45.64,0.09 v3(45.64,-1.03) ; v3(54.36,-4.94) 56.89,-4.94 57.75,-4.08 64.13,-4.08 64.29,-4.24 64.93,-4.24 65.43,-3.74 v5(66.07,-3.74)
  F.Cu w0.3: U42.52@87.11,-5.725 87.11,-4.53 v4(87.33,-4.31)
  In1.Cu w0.08: v3(45.64,-1.03) 46.23,-1.62 49.76,-1.62 51.345,-3.205 51.575,-3.205 52.19,-3.82 52.19,-4.04 52.84,-4.69 53.33,-4.69 53.58,-4.94 v3(54.36,-4.94) 54.36,-7.55 v3(54.39,-7.58)
  In3.Cu w0.08: v2(31.38,2.21) 32.08,1.51 33.59,1.51 34.4,0.7 36.25,0.7 36.71,0.24 38.67,0.24 39.2,-0.29 45.22,-0.29 v2(45.62,0.11) ; v5(66.07,-3.74) 66.07,-3.6 66.47,-3.2 66.94,-3.2 67.1,-3.36 72.79,-3.36 73.22,-2.93 82.76,-2.93 83.02,-3.19 86.17,-3.19 87.29,-4.31 v4(87.33,-4.31)
  In5.Cu w0.08: v2(17.38,1.92) 21,1.92 21.98,2.9 29.67,2.9 30.36,2.21 v2(31.38,2.21)
  In8.Cu w0.08: v1(-2.19,1.8) -2.19,-0.08 -2.06,-0.21 v1(-2.06,-0.65) ; v1(7.47,-0.19) 7.47,-0.78 7.92,-1.23 11.18,-1.23 ; v1(8.86,-12.69) 8.86,-11.23 9.36,-10.73 9.36,-7.33 9.54,-7.15 9.54,-3.46 11.18,-1.82 11.18,-1.23 ; v1(10.49,-27.99) 10.49,-28.48 11,-28.99 v1(12.14,-28.99) ; v1(11.58,0.84) 11.81,0.61 12.28,0.61 12.49,0.4 12.49,-0.93 12.19,-1.23 11.18,-1.23
  B.Cu w0.08: R319.2@-2.78,-2.4 -2.6,-2.4 -2.06,-1.86 v1(-2.06,-0.65) -1.91,-0.65 -1.85,-0.71 -0.85,-0.71 -0.6,-0.46 -0.1,-0.46 0.16,-0.72 1.7,-0.72 1.92,-0.5 1.92,-0.07 2.8,0.81 5.79,0.81 6.79,-0.19 v1(7.47,-0.19) ; v1(-2.19,1.8) v1@-2.19,1.82 ; v1(8.86,-12.69) 8.86,-15.25 10.05,-16.44 10.05,-18.54 9.53,-19.06 8.42,-19.06 8.21,-19.27 8.21,-19.53 8.6,-19.92 8.6,-23.71 8.86,-23.97 8.86,-25.55 10.18,-26.87 10.18,-27.68 v1(10.49,-27.99) ; v1(11.58,0.84) 11.58,2.57 12.99,3.98 16.71,3.98 17.38,3.31 v2(17.38,1.92) ; v1(12.14,-28.99) 13.26,-28.99 13.65,-28.6 U74.B1@14.495,-28.6
  B.Cu w0.2: v1@-2.19,1.82 U61.J16@-1.71,2.3
IOR#: R295.2 R296.1 R326.2 R364.1 U21.112 U22.42 U35.86 U56.1 U66.3 U66.5 U67.5 U72.7 U74.J3 | length 220.3
  F.Cu w0.08: v2(-2.75,-1.53) -2.22,-2.06 0.29,-2.06 1.97,-0.38 v3(1.97,0.23) ; v3(-0.81,7.27) -0.77,7.23 -0.13,7.23 v3(-0.1,7.2) ; v3(13.77,-3.94) 13.77,-5.41 14.12,-5.76 16.49,-5.76 16.63,-5.9 v3(16.91,-5.9) ; v3(17.45,-12.45) v3(18.41,-12.45) ; v2(18,-22.93) 18.38,-22.93 18.6,-23.15 U35.86@19.61,-23.15
  In1.Cu w0.08: v3(-0.81,7.27) -0.81,8.13 0.04,8.98 1.405,8.98 1.82,8.565 v3(1.82,8.535) ; v3(-0.1,7.2) 0.48,7.2 0.77,6.91 0.77,6.45 0.47,6.15 0.47,5.8 0.63,5.64 0.63,3.5 2.08,2.05 2.08,0.99 1.97,0.88 v3(1.97,0.23) 2.48,0.74 4.29,0.74 4.8,0.23 6.75,0.23 8.06,-1.08 9.12,-1.08 9.73,-1.69 11.65,-1.69 12.22,-1.12 12.96,-1.12 13.77,-1.93 v3(13.77,-3.94) ; v3(16.91,-5.9) 16.91,-8.5 18.41,-10 v3(18.41,-12.45) ; v3(17.45,-12.45) 17.45,-13.28 16.5,-14.23 16.5,-15.66 16.86,-16.02 16.86,-18.18 16.6,-18.44 16.6,-19.69 17.04,-20.13 17.04,-20.76 17.24,-20.96 17.24,-22.63 17.54,-22.93 v2(18,-22.93)
  In3.Cu w0.08: v2(18,-22.93) 19.26,-22.93 21.26,-20.93 33.76,-20.93 35.41,-19.28 37.68,-19.28 39.72,-21.32 42.28,-21.32 44,-19.6 45.91,-19.6 47.14,-20.83 49.26,-20.83 50.56,-19.53 57.5,-19.53 57.85,-19.88 59.93,-19.88 61.85,-21.8 62.07,-21.8 63.42,-23.15 70.59,-23.15 71.97,-21.77 72.86,-21.77 73.61,-22.52 76.06,-22.52 76.76,-23.22 79.05,-23.22 79.57,-23.74 84.59,-23.74 85.01,-24.16 85.01,-24.71 83.74,-25.98 83.74,-26.53 83,-27.27 v4(82.99,-27.27)
  In5.Cu w0.08: v4(75.63,-16.86) 76.55,-17.78 81.36,-17.78 v4(81.69,-18.11)
  In8.Cu w0.08: v1(17.11,-20.19) 17.11,-22.04 v2(18,-22.93) ; v1(53.61,-26.48) 53.62,-26.49 v1(53.62,-29.39) ; v1(58.1,-26.48) 61.9,-26.48 62.19,-26.19 63.65,-26.19 64.76,-25.08 v1(64.76,-23.41) 64.695,-23.345 64.695,-19.13 65.335,-18.49 67.646,-18.49 67.686,-18.45 70.3,-18.45 v1(70.76,-17.99) ; v1(81.422,-8.86) 81.81,-9.247 81.81,-13.15 81.48,-13.48 81.48,-17.23 81.69,-17.44 v4(81.69,-18.11) 81.69,-22.28 81.6,-22.37 81.6,-24.35 82.99,-25.74 v4(82.99,-27.27) ; v1(84.89,-8.88) 85.52,-8.88 86.31,-9.67 v1(86.31,-9.74)
  B.Cu w0.08: R326.2@-3.77,-3.42 -3.64,-3.42 -3.28,-3.06 -3.28,-1.8 -3.01,-1.53 v2(-2.75,-1.53) ; U74.J3@17.03,-19.69 17.03,-20.11 v1(17.11,-20.19) ; v1(53.61,-26.48) 53.71,-26.38 58,-26.38 v1(58.1,-26.48) ; v1(53.62,-29.39) 53.62,-30.54 53.805,-30.725 U72.7@54.93,-30.725 ; v1(70.76,-17.99) 71.12,-17.99 71.575,-18.445 75.135,-18.445 75.63,-17.95 v4(75.63,-16.86) 74.63,-16.86 73.92,-16.15 73.92,-15.03 ; U66.5@72.733,-15 73.92,-15 73.92,-15.03 ; U66.3@72.733,-13.7 73.73,-13.7 73.92,-13.89 73.92,-15.03 ; v1(81.422,-8.86) 82.41,-8.86 82.44,-8.83 83.23,-8.83 83.28,-8.88 v1(84.89,-8.88)
IOW#: R298.2 R299.2 R318.1 U21.113 U25.2 U35.89 U56.4 U67.4 U72.8 U74.J2 | length 206.9
  F.Cu w0.08: v3(-4.79,5.98) -1.83,5.98 -0.89,5.04 1.61,5.04 2.08,5.51 v3(2.08,7.11) ; v3(-3.87,-2.27) -3.41,-2.73 v3(-2.18,-2.73) 0.72,-2.73 v3(1.01,-2.44) ; v3(5.98,9.91) 5.98,11.83 6.4,12.25 9.46,12.25 10.09,12.88 13.7,12.88 15.42,11.16 v3(16.55,11.16) ; v3(13.11,-3.92) 13.39,-4.2 v3(13.39,-5.96) ; v2(16.56,-20.37) 17.09,-20.9 v3(18.19,-20.9) 18.19,-21.21 18.63,-21.65 U35.89@19.61,-21.65 ; v3(18.54,10.48) 19.02,10 U25.2@19.02,8.48
  In1.Cu w0.08: v3(-4.79,5.98) -4.79,5.48 -4.95,5.32 -4.95,2.86 -3.54,1.45 -3.54,0.97 -3.72,0.79 -3.72,-2.12 v3(-3.87,-2.27) ; v3(-2.18,-2.73) -2.12,-2.79 -2.12,-5.25 -1.86,-5.51 v2(-1.1,-5.51) ; v3(1.01,-2.44) 1.63,-2.44 2.66,-3.47 9.2,-3.47 9.66,-3.01 11.03,-3.01 11.25,-3.23 12.9,-3.23 13.11,-3.44 v3(13.11,-3.92) ; v3(1.32,8.535) 1.32,8.2 2.08,7.44 v3(2.08,7.11) 2.08,7.15 4.835,9.905 5.975,9.905 v3(5.98,9.91) ; v3(13.39,-5.96) 16.16,-5.96 16.71,-6.51 16.71,-8.48 16.48,-8.71 16.48,-9.9 17.07,-10.49 17.73,-10.49 18.12,-10.88 18.12,-12.92 16.68,-14.36 16.68,-15.33 17.05,-15.7 17.05,-18.25 16.8,-18.5 16.8,-19.42 17.24,-19.86 17.24,-20.64 17.5,-20.9 v3(18.19,-20.9) ; v3(16.55,11.16) 17.23,10.48 v3(18.54,10.48)
  In3.Cu w0.08: v4(57.55,-20.51) 57.55,-22.4 59.22,-24.07 v4(61.27,-24.07)
  In4.Cu w0.08: v4(51.72,-31.52) 53.29,-31.52 54.18,-30.63 54.18,-24.55 57.55,-21.18 v4(57.55,-20.51)
  In5.Cu w0.08: v2(16.56,-20.37) 17.18,-20.99 33.91,-20.99 35.51,-19.39 36.41,-19.39 36.51,-19.29 37.9,-19.29 39.12,-20.51 39.12,-21.84 39.69,-22.41 40.91,-22.41 42.4,-23.9 47.38,-23.9 47.8,-23.48 50.07,-23.48 51.42,-22.13 52.14,-22.13 52.36,-21.91 56.68,-21.91 57.55,-21.04 v4(57.55,-20.51)
  In8.Cu w0.08: v1(-4.82,-3.42) -3.73,-3.42 -3.21,-3.94 -2.47,-3.94 -2.18,-4.23 -2.18,-5.02 -1.69,-5.51 v2(-1.1,-5.51) ; v1(65.07,-21.72) 65.07,-19.13 65.54,-18.66 69.09,-18.66 69.1,-18.65 71.25,-18.65 v1(71.31,-18.71) ; v1(80.68,-17.75) 80.68,-16.65 81.1,-16.23 81.1,-11.132 v1(81.422,-10.81)
  B.Cu w0.08: U74.J2@15.765,-19.71 15.765,-20.135 15.89,-20.26 16.45,-20.26 v2(16.56,-20.37) ; v4(51.72,-31.52) 51.865,-31.375 U72.8@54.93,-31.375 ; v4(61.27,-24.07) 61.27,-24.09 61.92,-24.74 64.02,-24.74 64.26,-24.5 64.26,-22.1 64.64,-21.72 v1(65.07,-21.72) ; v1(71.31,-18.71) 76.39,-18.71 76.65,-18.97 78.77,-18.97 79.99,-17.75 v1(80.68,-17.75) ; v1(81.422,-10.81) 82.66,-10.81 82.92,-10.55 84.45,-10.55 84.58,-10.68 R299.2@85.29,-10.68 R298.2@85.29,-11.82
IRQ3: R115.2 U21.85 U22.35 U74.E1 | length 43
  F.Cu w0.08: v3@6.69,-4.94 v3(6.7,-4.93) ; v3(8.93,-9.94) 11.31,-9.94 v2(11.32,-9.95)
  F.Cu w0.2: U21.85@5.37,-4.94 v3@6.69,-4.94
  In1.Cu w0.08: v3(6.7,-4.93) 6.7,-7.72 7.23,-8.25 8.45,-8.25 8.93,-8.73 v3(8.93,-9.94) ; v2(11.32,-9.95) 11.32,-7.78 11.46,-7.64 11.46,-6.95 10.88,-6.37 10.88,-5.25 11.48,-4.65 12.41,-4.65 12.82,-4.24 14.1,-4.24 15.03,-3.31 v3(15.03,-2.21) 14.37,-2.21 13.08,-0.92 11.86,-0.92 v3(11.45,-1.33)
  In8.Cu w0.08: v1(12.37,-22.44) 12.37,-22.83 12.48,-22.94 12.48,-24.01 12.68,-24.21 v1(14.49,-24.21)
  B.Cu w0.08: v2(11.32,-9.95) 11.41,-10.04 11.41,-13.26 12.24,-14.09 12.24,-19 12.38,-19.14 12.38,-20.03 12.44,-20.09 12.44,-21.98 12.37,-22.05 v1(12.37,-22.44) ; v1(14.49,-24.21) 14.495,-24.215 U74.E1@14.495,-24.79
IRQ4: R384.2 U21.84 U22.36 U74.F4 | length 77.5
  F.Cu w0.08: v3(12.75,-3.58) 12.75,-3.19 13.23,-2.71 U22.36@15.03,-2.71
  F.Cu w0.3: U22.36@15.03,-2.71 16.23,-2.71 v2(16.41,-2.89)
  In1.Cu w0.08: v3(5.37,-5.44) 5.37,-5.12 6.82,-3.67 9.3,-3.67 9.67,-4.04 11.03,-4.04 11.49,-3.58 v3(12.75,-3.58)
  In4.Cu w0.08: v2(21.57,-24.38) 22.24,-24.38 22.78,-24.92 24.99,-24.92 27.48,-27.41 28.35,-27.41 28.79,-27.85 28.79,-28.49 29.15,-28.85 v2(29.15,-29.4)
  In8.Cu w0.08: v2(16.41,-2.89) 16.41,-3.61 16.31,-3.71 16.31,-6.08 15.83,-6.56 15.83,-7.91 16.3,-8.38 16.3,-11.53 16.88,-12.11 16.88,-13.17 16.54,-13.51 16.05,-13.51 15.89,-13.67 15.89,-13.93 16.14,-14.18 16.8,-14.18 16.96,-14.02 17.51,-14.02 17.83,-14.34 17.83,-15.14 18.16,-15.47 18.16,-17.48 18.36,-17.68 18.36,-19.3 18.37,-19.31 18.37,-22.62 v1(18.74,-22.99) ; v1(18.37,-24.13) 21.32,-24.13 v2(21.57,-24.38) ; v1(27.45,-37.26) 27.45,-36.49 28.23,-35.71 28.23,-33.63 v1(28,-33.4) ; v1(28.11,-30.41) 28.25,-30.27 28.25,-29.08 28.5,-28.83 29.03,-28.83 29.15,-28.95 v2(29.15,-29.4) ; v1(32.41,-33.8) 33.45,-34.84 33.45,-36.64 32.8,-37.29 v1(32.8,-37.57)
  B.Cu w0.08: v1(18.37,-24.13) 18.3,-24.06 18.3,-23.5 18.74,-23.06 v1(18.74,-22.99) ; v1(27.45,-37.26) 27.46,-37.27 27.78,-37.27 28.08,-37.57 29.09,-37.57 29.22,-37.44 30.02,-37.44 30.5,-36.96 31.69,-36.96 31.92,-37.19 32.42,-37.19 v1(32.8,-37.57) ; v1(28,-33.4) 28.52,-33.92 R384.2@28.52,-34.41 ; v1(28.11,-30.41) 28.11,-31.38 28.65,-31.92 31.77,-31.92 32.37,-32.52 32.37,-33.13 32.44,-33.2 32.44,-33.77 v1(32.41,-33.8)
IRQ5: R387.2 U21.83 U22.92 U74.F2 | length 106.9
  F.Cu w0.08: U21.83@5.37,-5.94 6.69,-5.94 6.82,-6.07 v3(7.28,-6.07) ; v3(9.05,-3.97) 9.05,-2.53 9.78,-1.8 9.78,-0.86 10.16,-0.48 v3(10.16,0.5) ; v3(17.47,-4.48) 17.57,-4.48 19.25,-6.16 23.78,-6.16 v3(25.56,-4.38) ; v3(26.98,-4.37) 26.98,-2.81 28.08,-1.71 U22.92@30.23,-1.71
  In1.Cu w0.08: v3(7.28,-6.07) 7.28,-5.43 8.27,-4.44 8.27,-4.18 8.48,-3.97 v3(9.05,-3.97) ; v3(10.16,0.5) 12.32,0.5 13.5,-0.68 15.45,-0.68 15.86,-1.09 16.82,-1.09 17.74,-2.01 v2(17.74,-2.76) 17.74,-3.31 17.47,-3.58 v3(17.47,-4.48) ; v3(25.56,-4.38) 26.97,-4.38 v3(26.98,-4.37)
  In4.Cu w0.08: v2(15.2,-21.73) 15.7,-22.23 15.7,-23.14 16.22,-23.66 18.81,-23.66 20.26,-25.11 24.8,-25.11 27.29,-27.6 28.21,-27.6 28.56,-27.95 28.56,-28.72 28.77,-28.93 28.77,-29.7 28.96,-29.89 29.81,-29.89 v2(30.37,-29.33)
  In6.Cu w0.08: v2(15.2,-21.73) 14.26,-20.79 14.26,-11.93 14.66,-11.53 14.66,-10.08 12.77,-8.19 12.77,-6.97 14.38,-5.36 15.14,-5.36 v2(17.74,-2.76)
  In8.Cu w0.08: v2(15.2,-21.73) 15.82,-22.35 v1(15.82,-22.93) ; v1(28.39,-37.26) 28.39,-36.01 28.51,-35.89 v1(28.51,-33.4) ; v1(28.97,-30.41) 28.97,-30.2 29.34,-29.83 29.87,-29.83 v2(30.37,-29.33) ; v1(32.9,-33.77) 33.62,-34.49 33.62,-36.79 33.11,-37.3 v1(33.11,-37.95)
  B.Cu w0.08: U74.F2@15.765,-23.52 15.765,-22.985 v1(15.82,-22.93) ; v1(28.39,-37.26) 28.48,-37.17 29.91,-37.17 30.32,-36.76 31.82,-36.76 32.06,-37 32.94,-37 33.11,-37.17 v1(33.11,-37.95) ; v1(28.51,-33.4) 29.12,-34.01 29.12,-34.11 29.42,-34.41 R387.2@29.68,-34.41 ; v1(28.97,-30.41) 28.97,-31 29.7,-31.73 31.91,-31.73 32.57,-32.39 32.57,-33.07 32.63,-33.13 32.63,-33.4 32.9,-33.67 v1(32.9,-33.77)
IRQ7: R389.2 U21.81 U22.37 U74.G1 | length 95.1
  F.Cu w0.08: v2(3.86,-6.98) v2@3.9,-6.94 ; v3(13.28,-3.06) 13.83,-3.06 13.98,-3.21 U22.37@15.03,-3.21
  F.Cu w0.3: v2@3.9,-6.94 U21.81@5.37,-6.94
  In1.Cu w0.08: v2(3.86,-6.98) 3.32,-6.44 3.32,-4.03 3.01,-3.72 1.64,-3.72 0.67,-2.75 0.67,-2.34 0.9,-2.11 1.73,-2.11 2.88,-3.26 8.88,-3.26 9.33,-2.81 11.14,-2.81 11.66,-2.29 12.51,-2.29 v3(13.28,-3.06)
  In4.Cu w0.08: v2(12.04,-23.63) 12.72,-23.63 13.12,-23.23 14.42,-23.23 16.1,-24.91 16.85,-24.91 17.23,-25.29 17.23,-25.78 17.46,-26.01 18.23,-26.01 19.55,-27.33 26.58,-27.33 27.9,-28.65 28.15,-28.65 28.57,-29.07 28.57,-29.86 28.58,-29.87 28.58,-29.92 28.73,-30.07 30.84,-30.07 v2(31.57,-29.34)
  In6.Cu w0.08: v2(3.86,-6.98) 5.25,-6.98 7.51,-9.24 7.51,-20.13 8.73,-21.35 8.73,-23.56 9.12,-23.95 11.72,-23.95 11.78,-23.89
  In6.Cu w0.3: 11.78,-23.89 v2(12.04,-23.63)
  In8.Cu w0.08: v2(12.04,-23.63) 12.04,-21.85 12.3,-21.59 v1(13.06,-21.59) ; v1(29.4,-30.42) 29.78,-30.04 30.67,-30.04 30.95,-29.76 31.15,-29.76 v2(31.57,-29.34) ; v1(31.38,-35.08) 31.39,-35.09 v1(31.39,-37.4) ; v1(33.24,-38.46) 33.45,-38.25 33.45,-37.25 33.81,-36.89 33.81,-34.18 v1(33.4,-33.77)
  B.Cu w0.08: v1(13.06,-21.59) 13.835,-21.59 U74.G1@14.495,-22.25 ; v1(29.4,-30.42) 29.4,-30.63 30.26,-31.49 31.97,-31.49 32.84,-32.36 33.28,-32.36 33.57,-32.65 33.57,-33.24 33.4,-33.41 v1(33.4,-33.77) ; R389.2@30.82,-34.41 31.21,-34.41 31.38,-34.58 v1(31.38,-35.08) ; v1(31.39,-37.4) 31.49,-37.4 32.55,-38.46 v1(33.24,-38.46)
IRQ9: R325.2 U21.79 U74.N1 | length 30.2
  F.Cu w0.08: v3(3.72,-7.92) 3.74,-7.94 U21.79@5.37,-7.94
  In1.Cu w0.08: v2(1.49,-5.98) 1.02,-5.98 0.76,-6.24 0.76,-7.62 1.06,-7.92 v3(3.72,-7.92)
  In8.Cu w0.08: v1(11.6,-14.66) v1(13,-14.66)
  B.Cu w0.08: v2(1.49,-5.98) 1.22,-5.98 0.95,-6.25 0.95,-6.61 1.36,-7.02 2.66,-7.02 3.33,-6.35 7.38,-6.35 9.38,-8.35 9.38,-9.19 10.04,-9.85 10.55,-9.85 10.88,-10.18 R325.2@10.88,-12.05 9.97,-12.05 9.76,-12.26 9.76,-13.91 10.13,-14.28 11.22,-14.28 v1(11.6,-14.66) ; v1(13,-14.66) 13.03,-14.63 U74.N1@14.495,-14.63
IRQ10: R394.2 U21.78 U74.D5 | length 56.9
  F.Cu w0.08: U21.78@5.37,-8.44 7.2,-8.44 7.75,-8.99 v3(7.75,-12.4)
  In1.Cu w0.08: v3(7.75,-12.4) 8.82,-12.4 9.1,-12.68 9.1,-13.67 9.49,-14.06 10.18,-14.06 10.32,-14.2 10.32,-14.97 10.15,-15.14 10.15,-19.1 10.01,-19.24 10.01,-21.23 10.24,-21.46 10.24,-21.94 10.08,-22.1 v2(10.08,-22.6)
  In6.Cu w0.08: v2(6.2,-36.84) 6.19,-36.83 6.19,-31.17 8.57,-28.79 8.57,-27.17 9.96,-25.78 11.66,-25.78 12.04,-25.4 12.04,-24.55 12.69,-23.9 12.69,-23.08 12.05,-22.44 10.96,-22.44 10.8,-22.6 v2(10.08,-22.6)
  In8.Cu w0.08: v1(12.13,-24.25) 12.28,-24.4 13.18,-24.4 13.5,-24.72 15.27,-24.72 16.03,-23.96 16.81,-23.96 17.49,-24.64 18.82,-24.64 v1(19.65,-25.47)
  B.Cu w0.08: v2(6.2,-36.84) 6.21,-36.83 6.21,-35.05 7.63,-33.63 R394.2@8.27,-33.63 ; v2(10.08,-22.6) 9.75,-22.6 9.65,-22.7 9.65,-23.76 10.14,-24.25 v1(12.13,-24.25) ; U74.D5@19.57,-26.07 19.57,-25.55 v1(19.65,-25.47)
IRQ11: R396.2 U21.77 U74.B2 | length 32.8
  F.Cu w0.08: U21.77@5.37,-8.94 6.53,-8.94 6.78,-9.19 6.78,-11.41 6.57,-11.62 6.06,-11.62 5.54,-12.14 5.54,-15.63 v3(5.58,-15.67) ; v3(6,-17.64) 5.98,-17.66 5.98,-20.31 6.28,-20.61 7.85,-20.61 8.39,-21.15 8.39,-24.41 v2(9.26,-25.28)
  In1.Cu w0.08: v3(5.58,-15.67) 5.58,-17.22 v3(6,-17.64)
  In8.Cu w0.08: v1(11.1,-28.61) 11.42,-28.29 11.42,-27.51 11.19,-27.28 v1(10.52,-27.28) 10.9,-26.9 14.28,-26.9 14.84,-27.46 15.58,-27.46 15.82,-27.7 v1(15.82,-27.99)
  B.Cu w0.08: v2(9.26,-25.28) 9.97,-25.28 10.52,-25.83 v1(10.52,-27.28) ; U74.B2@15.765,-28.6 15.765,-28.045 v1(15.82,-27.99)
IRQ14: J11.24 R365.1 U21.75 U42.46 U74.B4 | length 170.9
  F.Cu w0.08: J11.24@54.39,-22.23 57,-22.23 58.63,-23.86 v3(58.63,-24.85) ; v3(63.32,-24.31) 63.32,-23.68 64.48,-22.52 71.09,-22.52 72.32,-21.29 74.66,-21.29 75,-20.95 75,-20.16 78.62,-16.54 v3(78.62,-15.26) ; v3(78.64,-12.08) 82.67,-12.08 v4(83.6,-11.15) 86.41,-11.15 87.91,-9.65 U42.46@89.385,-9.65
  F.Cu w0.3: v2(3.81,-9.8) 3.95,-9.94 U21.75@5.37,-9.94
  In1.Cu w0.08: v3(58.63,-24.85) 62.78,-24.85 v3(63.32,-24.31) ; v3(78.62,-15.26) 78.62,-12.1 v3(78.64,-12.08)
  In4.Cu w0.08: v2(3.81,-9.8) 3.81,-10.65 3.66,-10.8 3.66,-18.06 4.91,-19.31 12.39,-19.31 v2(12.75,-19.67) ; v2(12.77,-26.15) 13.32,-26.15 14.67,-27.5 17.19,-27.5 v2(17.68,-27.99)
  In5.Cu w0.08: v2(3.81,-9.8) 7.62,-13.61 20.46,-13.61 21.51,-12.56 25.21,-12.56 26.21,-13.56 32.31,-13.56 32.62,-13.25 34.02,-13.25 35.68,-11.59 42.08,-11.59 42.08,-11.62 43.28,-12.82 46.61,-12.82 46.81,-13.02 56.86,-13.02 58.02,-14.18 63.43,-14.18 64.01,-14.76 67.8,-14.76 68.88,-15.84 72.16,-15.84 73.66,-14.34 80.36,-14.34 80.93,-13.77 80.93,-12.08 81.86,-11.15 v4(83.6,-11.15)
  In6.Cu w0.08: v2(12.75,-19.67) 12.76,-19.68 12.76,-21.14 12.91,-21.29 12.91,-25.18 12.74,-25.35 12.74,-26.12 v2(12.77,-26.15)
  In8.Cu w0.08: v2(17.68,-27.99) 17.69,-28 v1(18.39,-28) ; v4(83.6,-11.15) 84.59,-11.15 v1(86.31,-12.87)
  B.Cu w0.08: U74.B4@18.3,-28.61 18.3,-28.09 v1(18.39,-28)
IRQ15: R391.2 U21.74 U74.C4 | length 76.9
  F.Cu w0.08: v3(5.26,-15.44) 5.25,-15.43 5.25,-11.85 v3(5.43,-11.67) ; v3(6.23,-23.14) 6.76,-23.67 v3(6.76,-23.94)
  In1.Cu w0.08: v3(5.26,-15.44) 5.26,-20.38 5.49,-20.61 5.78,-20.61 6.08,-20.91 6.08,-22.6 6.21,-22.73 6.21,-23.12 v3(6.23,-23.14) ; v3(5.37,-10.44) 5.43,-10.5 v3(5.43,-11.67) ; v3(6.76,-23.94) 10.27,-23.94 10.9,-23.31 10.9,-23.11 11.35,-22.66 11.98,-22.66 12.52,-23.2 12.52,-23.81 12.09,-24.24 12.09,-25.6 11.49,-26.2 11.49,-28 11.3,-28.19 11.3,-28.72 11.72,-29.14 11.72,-32.61 11.88,-32.77 11.88,-32.95 ; v2(9.36,-43.13) 9.9,-42.59 9.9,-36.01 11.88,-34.03 11.88,-32.95 ; v2(13.79,-32.42) 13.3,-32.91 11.92,-32.91 11.88,-32.95
  In8.Cu w0.08: v1(7.1,-30.58) 6.66,-30.58 6.32,-30.92 6.32,-34.92 7.01,-35.61 7.01,-40.26 9.36,-42.61 v2(9.36,-43.13) ; v1(10.79,-31.71) 11.79,-30.71 12.3,-30.71 14.04,-28.97 16.98,-28.97 17.1,-28.85 17.1,-27.82 17.56,-27.36 17.78,-27.36 18.39,-26.75 v1(18.39,-26.74)
  B.Cu w0.08: v1(7.1,-30.58) 8.67,-30.58 8.85,-30.76 8.85,-31.39 9.17,-31.71 v1(10.79,-31.71) ; R391.2@12.35,-33.63 12.35,-33.07 13,-32.42 v2(13.79,-32.42) ; U74.C4@18.3,-27.31 18.3,-26.83 v1(18.39,-26.74)
KB1_0: J17.8 U67.56 | length 25.5
  In8.Cu w0.08: v1(55.86,-34.77) 55.86,-29.2 56.23,-28.83 58.65,-28.83 v1(59.23,-29.41)
  B.Cu w0.08: J17.8@43.55,-36.7 43.55,-35.37 43.65,-35.27 45.16,-35.27 45.71,-34.72 50.9,-34.72 51.85,-35.67 54.14,-35.67 55.04,-34.77 v1(55.86,-34.77) ; v1(59.23,-29.41) U67.56@60.76,-29.41
KB1_1: J17.7 U67.55 | length 27.9
  In8.Cu w0.08: v1(58.59,-34.58) 58.87,-34.58 59.15,-34.3 59.15,-33.69 58.74,-33.28 58.74,-31.03 v1(59.43,-30.34)
  B.Cu w0.08: J17.7@44.55,-36.7 44.55,-38.01 44.27,-38.29 44.27,-38.87 44.55,-39.15 46.6,-39.15 47.03,-38.72 47.03,-35.46 47.16,-35.33 50.93,-35.33 51.63,-36.03 54.6,-36.03 55.21,-35.42 57.47,-35.42 58.31,-34.58 v1(58.59,-34.58) ; v1(59.43,-30.34) 59.43,-30.05 59.57,-29.91 U67.55@60.76,-29.91
KB1_2: J17.1 U67.54 | length 16.1
  In8.Cu w0.08: v1(50.59,-36.72) 51.05,-36.26 59.72,-36.26 60.83,-35.15 60.83,-33.07 61.31,-32.59 61.31,-32.04 60.76,-31.49 v1(60.76,-30.41)
  B.Cu w0.08: J17.1@50.55,-36.7 50.57,-36.72 v1(50.59,-36.72)